# EAGLE board .sch (EAGLE 6.6.0)
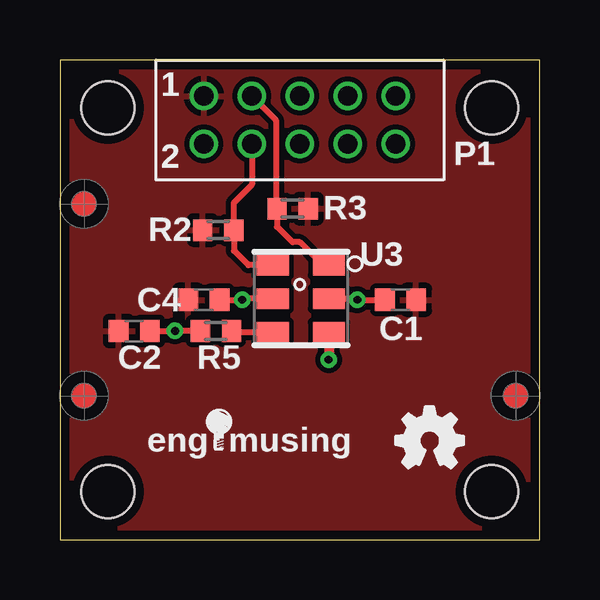
[diagram p0: board, top side]
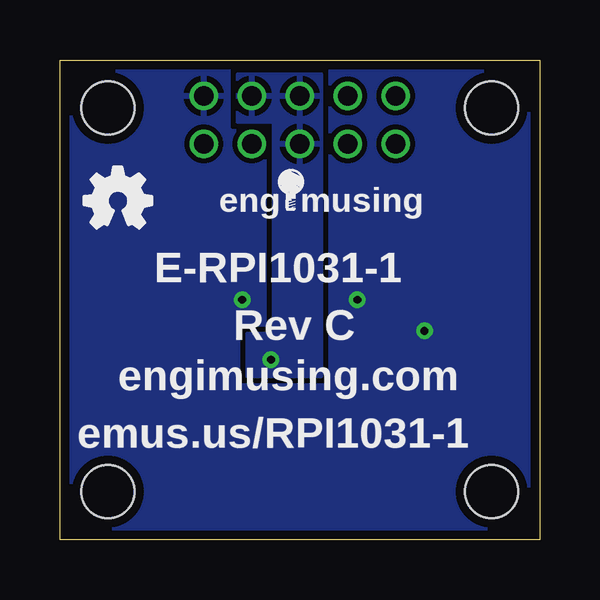
[diagram p1: board, bottom side, seen from below]

Size 20 x 20 mm. Coordinates in mm from the lower left corner, seen from the top.
Outline: 0,0 20,0 20,20 0,20 0,0
Copper layers (1*16): Top 0.0356mm / dielectric 1.5011mm / Bottom 0.0356mm
Design rules "OshPark-2Lyr": minimum track width 6mil, minimum drill 13mil, track to track 6mil, track to pad 6mil, pad to pad 6mil, via to via 6mil, smd to smd 6mil, copper to edge 15mil, drill to drill 6mil, minimum pad ring 7mil, minimum via ring 7mil, stop-mask expansion 3mil, vias tented up to drill 13mil, thermal gap 10mil
Net classes: 2 gnd: width 0.254 mm, drill 0.61 mm, clearance 0.254 mm
Holes 2.2 mm at 18,18 2,2 2,18 18,2

## Footprints (pad centres in the part's own frame; a part is rotated, then mirrored left to right if it is on the bottom)
C0603 = smd 0.825 x 0.925: 1 -0.65,0; 2 0.65,0
DF11SP-10-H = drill 0.8: 1 4,-1; 2 4,1; 3 2,-1; 4 2,1; 5 0,-1; 6 0,1; 7 -2,-1; 8 -2,1; 9 -4,-1; 10 -4,1
R0603 = smd 0.8 x 0.9: 1 -0.65,0; 2 0.65,0
RPI-1031 = smd 1.35 x 0.85: 1 1.22,1.445; 2 1.22,0.045; 3 1.22,-1.355; 4 -1.13,1.445; 5 -1.13,0.045; 6 -1.13,-1.355

## Placement (x,y rotation side)
C1  0.1uF  [C0603]  14.2,10 0 top
C2  0.1uF  [C0603]  3.1,8.7 180 top
C4  1uF 6.3V  [C0603]  6,10 180 top
P1  DF11-10_STRAIGHT_PIN  [DF11SP-10-H]  10,17.5 180 top
R2  20K  [R0603]  6.6,12.9 0 top
R3  20K  [R0603]  9.7,13.8 180 top
R5  220  [R0603]  6.5,8.7 180 top
U3  RPI-1031  [RPI-1031]  10,10 0 top
U$1  [OSHW_FILLX100_NOTEXT]  14,3 0 top
U$2  [LOGO]  8,4 0 top
U$3  [LOGO_BULB]  32,13 0 top  (outside the outline)
U$4  [COPYRIGHT]  9,-4 0 top  (outside the outline)
U$5  [OSHW_FILLX100_NOTEXT]  19,13 0 bottom
U$6  [LOGO]  9,14 0 bottom
U$9  [FIDUCIAL_G10]  1,6 0 top
U$11  [FIDUCIAL_G10]  1,14 0 top
U$12  [FIDUCIAL_G10]  19,6 0 top

## Library data of the parts
C1 C2 C4 P1 R2 R3 R5 U3 U$1-U$6 U$9 U$11 U$12 = Engimusing

## Nets
+VIO: C1.1 C2.1 C4.1 P1.9 R5.2 U3.2 U3.5
AN: R5.1 U3.6
DIODE_EN: P1.5 P1.6 P1.7 U3.3
GND: C1.2 C2.2 C4.2 P1.1 R2.1 R3.1
S1: P1.3 R3.2 U3.1
S2: P1.4 R2.2 U3.4

## Tracks (layer width: path | path; a pad name or v marks a point on that pad's centre or on a via)
+VIO  (via drill 0.33 pad 0.61)
  Top 0.25: U3.5 7.6,10.04 v7.6,10 C4.1 | R5.2 v4.8,8.7 C2.1 | U3.2 12.36,10.04 v12.4,10 C1.1
  pour Bottom (isolate 0.21, rank 2): 0,20 20,20 20,0 0,0
AN
  Top 0.25: U3.6 7.15,8.64 R5.1
DIODE_EN  (via drill 0.33 pad 0.61)
  Top 0.406: U3.3 11.22,7.52 v11.2,7.5
  pour Bottom: 9.1,19.4 9.1,6.8 12.2,6.8 12.2,8.6 11.1,8.6 11.1,17.4 12.6,17.4 12.6,19.4
GND
  pour Top (isolate 0.21): 0,0 0,20 20,20 20,0
S1
  Top 0.25: 9,17.5 P1.3
  Top 0.254: 9,17.5 9,13.85 R3.2 9.05,13.05 9.7,12.4 10,12.4 10.96,11.45 U3.1
S2
  Top 0.25: 8.87,11.4 U3.4
  Top 0.254: P1.4 8,14.8 7.25,14.05 R2.2 7.25,12.05 7.86,11.45 U3.4

## Text on the board
bPlace: E-RPI1031-1 | Rev C | engimusing.com | emus.us/RPI1031-1
_tNames: P1 | R3 | R2 | U3 | C4 | C1 | C2 | R5